# EAGLE board marqee_attiny85 (EAGLE 8.6.0)
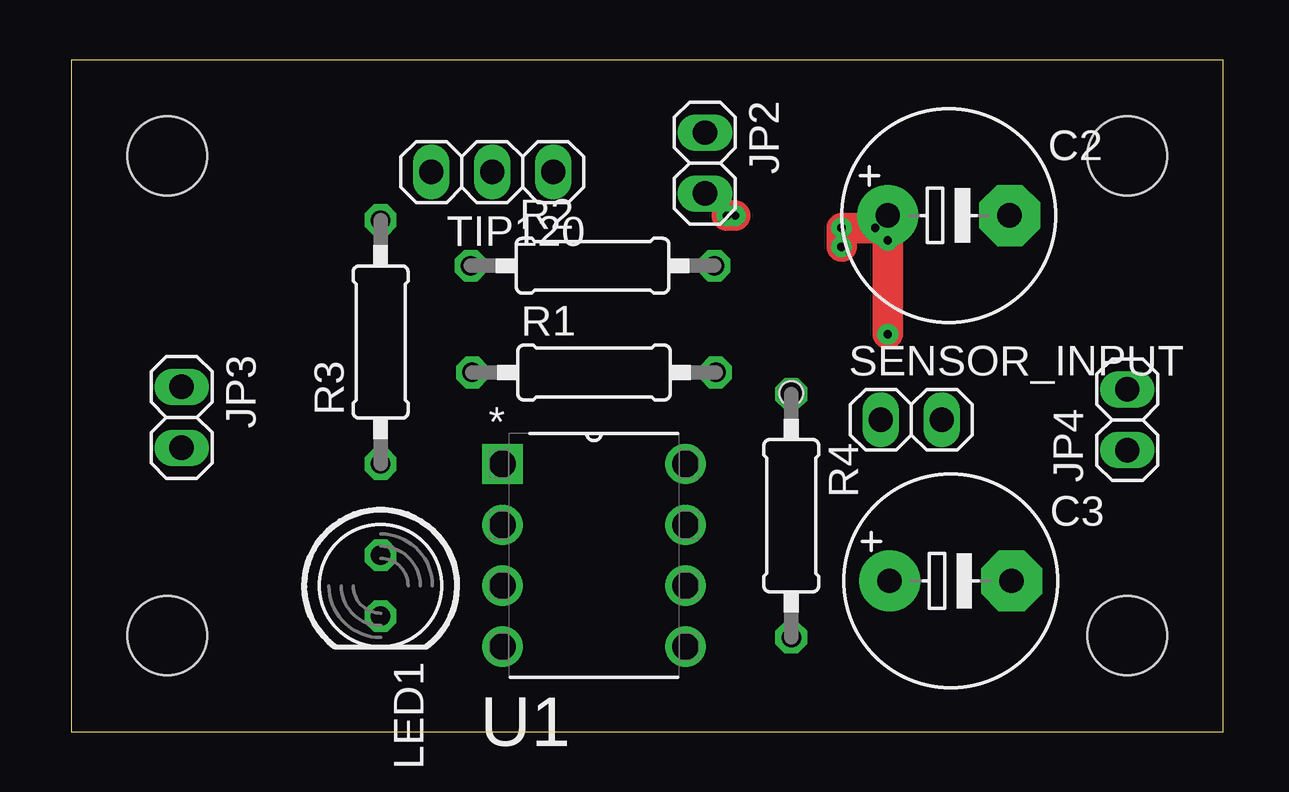
[diagram p0: board, top side]
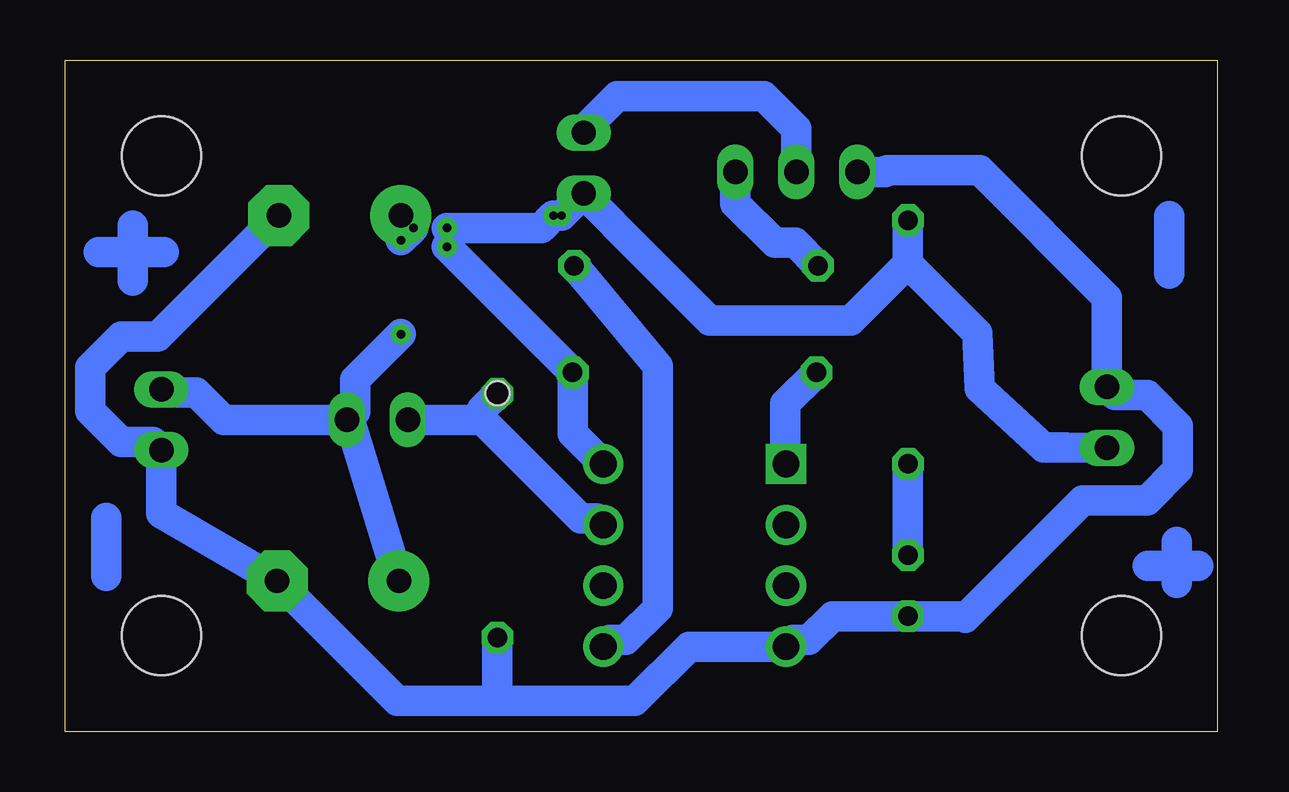
[diagram p1: board, bottom side, seen from below]

Size 48 x 28 mm. Coordinates in mm from the lower left corner, seen from the top.
Outline: 0,0 48,0 48,28 0,28 0,0
Copper layers (1*16): Top 0.035mm / dielectric 1.5mm / Bottom 0.035mm
Design rules "OthermillDRC_1_32_v2": minimum track width 8mil, minimum drill 0.8mm, track to track 0.794003125mm, track to pad 0.794003125mm, pad to pad 0.794003125mm, via to via 0.794003125mm, smd to smd 0mil, copper to edge 0mil, drill to drill 1mil, minimum pad ring 10mil, minimum via ring 10mil, stop-mask expansion 1mil, vias tented up to drill 30mil, thermal gap 10mil
Holes 3.3 mm at 4,24 44,24 4,4 44,4
Holes 1 mm at 30,14.1

## Footprints (pad centres in the part's own frame; a part is rotated, then mirrored left to right if it is on the bottom)
E5-8,5 = drill 1.016 pad 2.54: + -2.54,0 | drill 1.016 pad 2.54 octagon: - 2.54,0
1X02 = drill 1.016 long: 1 -1.27,0; 2 1.27,0
LED5MM = drill 0.813 octagon: A -1.27,0; K 1.27,0
0207/10 = drill 0.813 octagon: 1 -5.08,0; 2 5.08,0
1X03 = drill 1.016 long: 1 -2.54,0; 2 0,0; 3 2.54,0
DIP254P762X533-8 = drill 1.118 square: 1 -7.62,7.62 | drill 1.118: 2 -7.62,5.08; 3 -7.62,2.54; 4 -7.62,0; 5 0,0; 6 0,2.54; 7 0,5.08; 8 0,7.62

## Placement (x,y rotation side)
C2  47uF  [E5-8,5]  36.56,21.52 0 top
C3  47uF  [E5-8,5]  36.64,6.28 0 top
JP2  [1X02]  26.4,23.7 270 top
JP3  [1X02]  4.6,13.1 270 top
JP4  [1X02]  44,13 90 top
LED1  [LED5MM]  12.89,6.08 270 top
R1  10k  [0207/10]  21.78,14.97 0 top
R2  1k  [0207/10]  21.72,19.42 0 top
R3  220  [0207/10]  12.89,16.24 90 top
R4  1k  [0207/10]  30,9 270 top
SENSOR_INPUT  [1X02]  35,13 0 top
TIP120  [1X03]  17.54,23.33 180 top
U1  ATTINY85-20PU  [DIP254P762X533-8]  25.59,3.54 0 top

## Library data of the parts
C2 C3 = rcl; SPICEPREFIX: C
JP2-JP4 SENSOR_INPUT TIP120 = pinhead
LED1 = led
R1-R4 = resistor
U1 = Atmel_By_element14_Batch_1; MPN: ATTINY85-20PU; OC_FARNELL: 1455162; OC_NEWARK: 58M3796; PACKAGE: PDIP-8; SUPPLIER: Atmel

## Nets
ANALOG_SENSOR_IN: R4.1 SENSOR_INPUT.1 U1.7
GND: C2.- C3.- JP3.1 JP4.1 LED1.K R4.2 TIP120.3 U1.4
N$1: R1.1 U1.1
N$2: R2.1 TIP120.1
N$3: LED1.A R3.1
N$4: R2.2 U1.5
THING: JP2.1 TIP120.2
VCC: C2.+ C3.+ JP2.2 JP3.2 JP4.2 R1.2 R3.2 SENSOR_INPUT.2 U1.8

## Tracks (layer width: path | path; a pad name or v marks a point on that pad's centre or on a via)
ANALOG_SENSOR_IN
  Bottom 1.27: U1.7 25.86,8.89 26.53,8.89 30.64,13 | 30.64,13 SENSOR_INPUT.1 | R4.1 30.64,13.44 30.64,13
GND
  Bottom 1.27: TIP120.3 13.84,23.33 13.76,23.41 9.91,23.41 4.6,18.1 JP3.1 4.25,14.02 2.93,14.02 1.65,12.74 1.65,10.92 2.93,9.64 5.61,9.64 10.5,4.75 10.56,4.81 LED1.K 16.03,4.81 17.03,3.81 17.7,3.81 U1.4 22,3.54 24.27,1.27 30,1.27 | R4.2 30,1.27 | C2.- 44.16,16.46 45.67,16.46 46.95,15.18 46.95,13.36 45.67,12.08 44.35,12.08 JP4.1 44,9.1 C3.- 34.17,1.27 30,1.27
N$1
  Bottom 1.27: R1.1 18,13.67 18,11.13 | 18,11 18,11.13 | 18,11.13 U1.1
N$2
  Bottom 1.27: R2.1 17.6,20.38 18.45,20.38 20.08,22.01 TIP120.1
N$3
  Bottom 1.27: R3.1 LED1.A
N$4
  Bottom 1.27: U1.5 25.32,3.81 24.65,3.81 23.32,5.14 23.32,15.24 R2.2
N$7
  Bottom 1.27: 45.2,21.1 45.2,18.8
N$8
  Bottom 1.27: 43.9,20 46.6,20
N$9
  Bottom 1.27: 46.3,8.9 46.3,6.5
N$10
  Bottom 1.27: 2,21.5 2,19.1
N$11
  Bottom 1.27: 1.7,7.9 1.7,6.2
N$12
  Bottom 1.27: 2.9,6.9 0.8,6.9
THING
  Bottom 1.27: TIP120.2 17.54,25.14 18.9,26.5 25,26.5 26.4,25.1 26.37,24.97 JP2.1
VCC  (via drill 0.35)
  Top 1.27: v27.32,21.51 v27.66,21.51 | v33.5,21 v32.1,21 v32.1,20.21 | v34.02,16.57 v34.02,20.48
  Bottom 1.27: JP3.2 6.29,11.84 7.24,11.84 9.9,14.3 10,16.62 12.89,19.51 | 12.89,19.51 15.28,17.13 21.15,17.13 24.73,20.71 JP2.2 v27.32,21.51 | 12.89,19.51 R3.2 | U1.8 26.86,12.43 R1.2 v32.1,20.21 | JP4.2 43.87,14.14 42.55,14.14 41.41,13 SENSOR_INPUT.2 | SENSOR_INPUT.2 36.1,12.83 C3.+ | v27.66,21.51 28.18,21 v32.1,21 | SENSOR_INPUT.2 35.92,13.35 35.92,14.67 v34.02,16.57 | C2.+ v33.5,21 v34.02,20.48

## Text on the board
Document: Holes are Nx10mm apart / (so like 10mm, 20mm, 30mm, etc...) | Holes have a / 3.3mm Drill hole | All Traces must be on / the BOTTOM layer (blue) / and any "air-wires" will be / on the TOP layer (red)